# Altium PCB DRV8886_Power_Breakout.PcbDoc
Units mil, origin at the board's own origin, x right, y up, seen from the top; angles counter-clockwise.
Board outline 2650 x 2015.86 mil, 2 copper layers (Top Layer, Bottom Layer); 28 components, 27 nets, 98 pads, 28 vias.
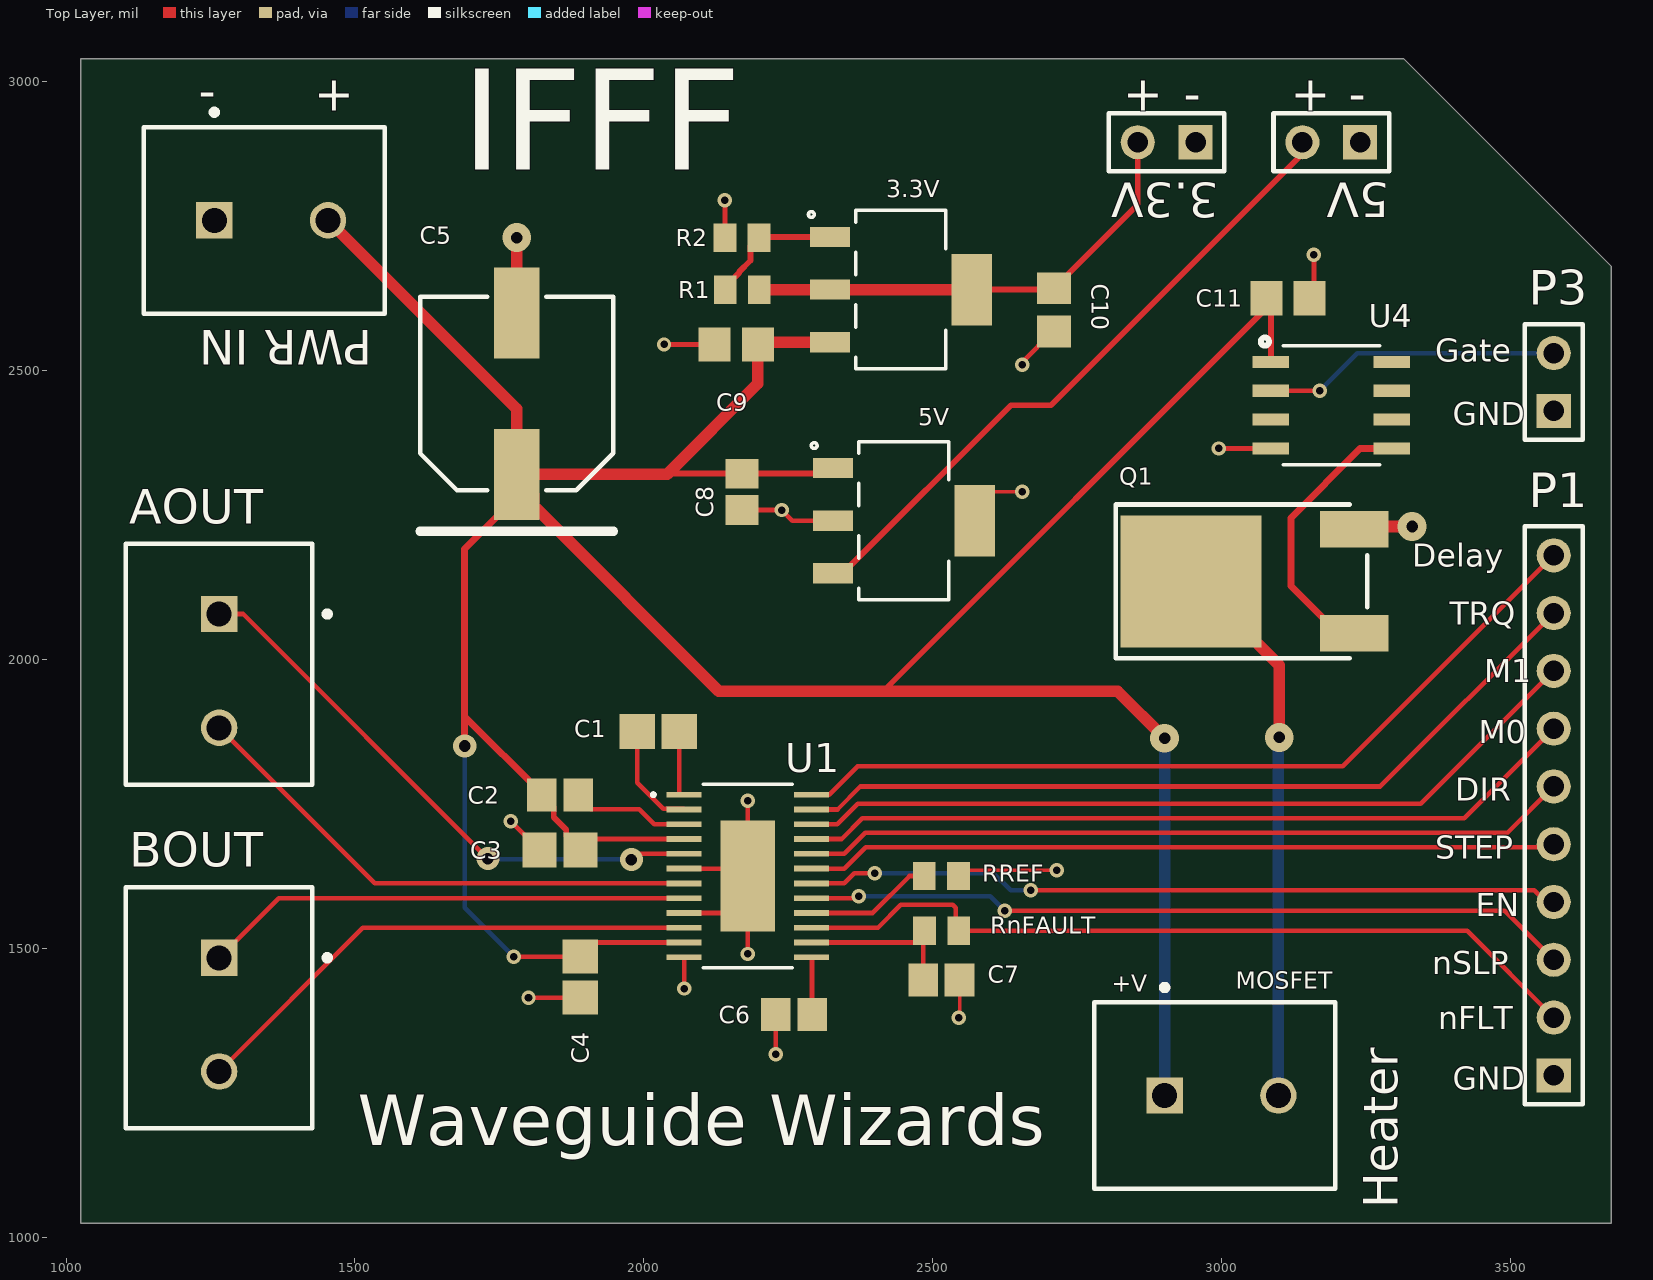
[diagram p0: Top Layer view]
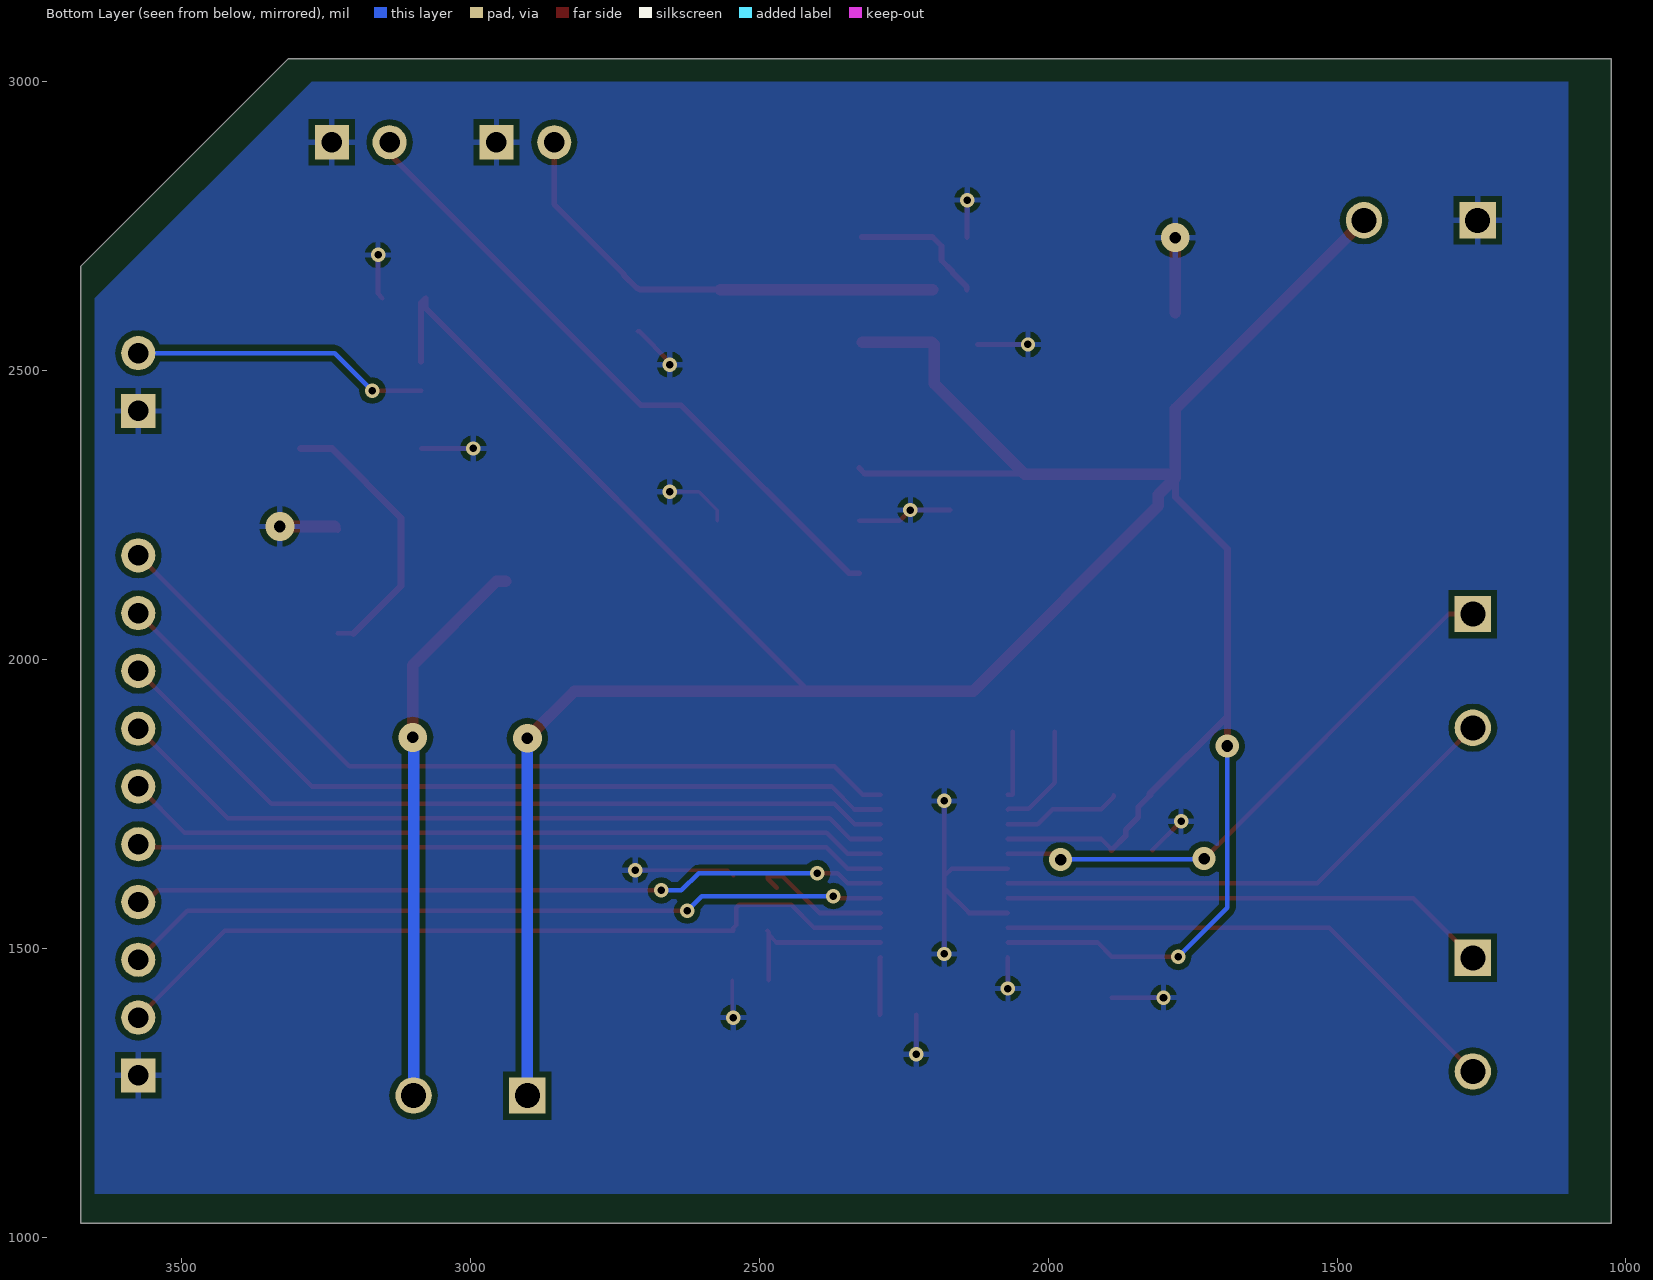
[diagram p1: Bottom Layer view, seen from below]

## Layer stack, top to bottom
Top Solder: solder mask 0.4, Solder Resist, Dk 3.5
Top Layer: signal copper 1.4
Dielectric 1: dielectric 12.6, FR-4, Dk 4.8
Bottom Layer: signal copper 1.4
Bottom Solder: solder mask 0.4, Solder Resist, Dk 3.5

## Board outline
1025,1024.14 1025,3040 3315,3040 3675,2680 3675,1024.14

## Design rules (kind name [scope] priority, off if disabled: settings)
Clearance [All] p1: gap=10 ignorepadtopadclearanceinfootprint=FALSE except(0: Arc-Hole Track-Hole SMDPad-Hole THPad-Hole Via-Hole Fill-Hole Poly-Hole Region-Hole Text-Hole)
PolygonConnect [All] p1: connectstyle=Relief reliefconductorwidth=10 reliefentries=4 polygonreliefangle="90 Angle" airgapwidth=10
RoutingVias [All] p1: holewidth=13 width=25 viastyle="Through Hole" minholewidth=13 minwidth=25 maxholewidth=28 maxwidth=50
SolderMaskExpansion [All] p1: expansion=4
Width [All] p1: maxlimit=20 minlimit=6 preferedwidth=6
30 further rules are at their usual default settings.

## Classes and differential pairs
component class IFFF_DRV8886_Power_Breakout: 3.3V 5V AOUT BOUT C1 C2 C3 C4 C5 C6 C7 C8 C9 C10 C11 Heater P1 P3 "PWR IN" Q1 R1 R2 RnFAULT RREF U1 U4

## Components (designator, comment, footprint, x,y, rotation, side; value= is the part's Value field where it differs from the comment)
3.3V "Part Number: LM317DCYR" DCY4 2445,2640 r270 top value=Value (schematic designator U2)
3.3V "Header 2" HDR1X2 2955,2895 r180 top (schematic designator P2)
5V "Header 2" HDR1X2 3240,2895 r180 top (schematic designator P4)
5V "Part Number: LM7805MPX/NOPB" DCY4 2450,2240 r270 top value=Value (schematic designator U3)
AOUT "282836-2" TECO-282836-2_V 1265,1980 r270 top
BOUT "282836-2" TECO-282836-2_V 1265,1385 r270 top
C1 "0.022uF" CAPC2013X94X50ML20T25 2025,1875 r0 top
C2 "0.22uF" CAPC2013X145X50NL20T25 1855,1765 r0 top
C3 "0.01uF" CAPC2013X88X50ML20T25 1855,1670 r0 top
C4 "0.01uF" CAPC2013X88X50ML20T25 1890,1450 r90 top
C5 "100uF" PNSC-FK-V-F_V 1780,2460 r90 top
C6 "0.47uF" CAPC2013X110X50NL20T25 2260,1385 r0 top
C7 "0.47uF" CAPC2013X110X50NL20T25 2515,1445 r180 top
C8 "0.22uF" CAPC2013X145X50NL20T25 2170,2290 r90 top
C9 "10uF" CAPC2013X135X45ML10T25 2160,2545 r180 top
C10 "10uF" CAPC2013X135X45ML10T25 2710,2605 r270 top
C11 "10uF" CAPC2013X135X45ML10T25 3115,2625 r0 top
Heater "282836-2" TECO-282836-2_V 3000,1245 r0 top
P1 "Header 10" HDR1X10 3575,1280 r90 top
P3 "Extruder Control" HDR1X2 3575,2430 r90 top
"PWR IN" "282836-2" TECO-282836-2_V 1355,2760 r0 top
Q1 "SMD 60V 46A" SC_TO-252AA 2947.13,2135 r0 top (schematic designator Q*)
R1 "" RESC2013X60X40LL20T25_A 2170.47,2640 r0 top
R2 "" RESC2013X60X40LL20T25_A 2170,2730 r0 top
RnFAULT "10k" RESC2013X60X40LL20T25_A 2515.47,1530 r0 top
RREF "30k" RESC2013X60X40LL20T25_A 2515,1625 r180 top
U1 "DRV8886" PWP0024B_N 2180,1625 r0 top
U4 "Part Number: MIC5015YM-TR" SOIC-8_M 3190,2440 r0 top value=Value

## Footprints (in the part's own frame and the unit in brackets; to place one, negate y for a bottom-side part, rotate by r counter-clockwise, add the part's x,y. Pads: shape width x height; smd on the part's side, far side on the other; paste and mask are expansions set on the pad)
CAPC2013X88X50ML20T25 [mm] "Chip Capacitor, 2-Leads, Body 2.00x1.25mm, IPC Low Density"
  rect 1.5x1.55 smd: 1(-0.9,0) 2(0.9,0)
  body extent -1.1,-0.72 1.1,0.72, height 0.88
CAPC2013X94X50ML20T25 [mm] "Chip Capacitor, 2-Leads, Body 2.01x1.25mm, IPC Low Density"
  rect 1.55x1.55 smd: 1(-0.925,0) 2(0.925,0)
  body extent -1.1,-0.72 1.11,0.72, height 0.94
CAPC2013X110X50NL20T25 [mm] "Chip Capacitor, 2-Leads, Body 2.00x1.25mm, IPC Medium Density"
  rect 1.3x1.45 smd: 1(-0.8,0) 2(0.8,0)
  body extent -1.1,-0.72 1.1,0.72, height 1.1
CAPC2013X135X45ML10T25 [mm] "Chip Capacitor, 2-Leads, Body 2.00x1.25mm, IPC Low Density"
  rect 1.4x1.5 smd: 1(-0.95,0) 2(0.95,0)
  body extent -1.05,-0.67 1.05,0.67, height 1.35
CAPC2013X145X50NL20T25 [mm] "Chip Capacitor, 2-Leads, Body 2.00x1.25mm, IPC Medium Density"
  rect 1.3x1.45 smd: 1(-0.8,0) 2(0.8,0)
  body extent -1.1,-0.72 1.1,0.72, height 1.45
DCY4 [mil]
  rect 35x69.5 smd paste+0 mask+0: 1(-91,-122.75) 2(0,-122.75) 3(91,-122.75)
  rect 124x69.5 smd paste+0 mask+0: 4(0,122.75)
  silkscreen extent -137,-160 137,78, body extent -132,-144 132,144, height 67
HDR1X2 [mm] "Connector; Header; 2 Position"
  rect 1.5x1.5 hole 0.9: 1(0,0)
  round 1.5 hole 0.9: 2(2.54,0)
  silkscreen extent -1.27,-1.27 3.81,1.27
HDR1X10 [mm] "Connector; Header; 10 Position"
  rect 1.5x1.5 hole 0.9: 1(0,0)
  round 1.5 hole 0.9: 2(2.54,0) 3(5.08,0) 4(7.62,0) 5(10.16,0) 6(12.7,0) 7(15.24,0) 8(17.78,0) 9(20.32,0) 10(22.86,0)
  silkscreen extent -1.27,-1.27 24.13,1.27
PNSC-FK-V-F_V [mm] "CAPAE, 2-Leads, Body 8.50x8.50mm"
  rect 4x2 smd: 1(-3.55,0) 2(3.55,0)
  silkscreen extent -6.05,-4.25 4.25,4.25, body extent -5,-4.25 5,4.25, height 10.5
PWP0024B_N [mil]
  rect 61x10 smd paste+0 mask+2: 1(-110.24,140.75) 2(-110.24,115.16) 3(-110.24,89.57) 4(-110.24,63.98) 5(-110.24,38.39) 6(-110.24,12.8) 7(-110.24,-12.8) 8(-110.24,-38.39) 9(-110.24,-63.98) 10(-110.24,-89.57) 11(-110.24,-115.16) 12(-110.24,-140.75) 13(110.24,-140.75) 14(110.24,-115.16) 15(110.24,-89.57) 16(110.24,-63.98) 17(110.24,-38.39) 18(110.24,-12.8) 19(110.24,12.8) 20(110.24,38.39) 21(110.24,63.98) 22(110.24,89.57) 23(110.24,115.16) 24(110.24,140.75)
  rect 94x192 smd paste-95.5 mask+3: 25(0,0)
  silkscreen extent -167,-158 77,158, body extent 0,0 10,10, height 10
RESC2013X60X40LL20T25_A [mm] "Chip Resistor, 2-Leads, Body 2.20x1.35mm, IPC High Density"
  rect 1x1.25 smd: 1(-0.75,0) 2(0.75,0)
  body extent -1.1,-0.67 1.1,0.67, height 0.6
SC_TO-252AA [mm] "D-PAK"
  rect 3x1.6 smd: 1(7.18,-2.286) 3(7.18,2.286)
  rect 6.2x5.8 smd: 2(0,0)
  silkscreen extent -3.3,-3.38 7.75,3.38, body extent -2.7,-3.29 7,3.29, height 2.3
SOIC-8_M [mil]
  rect 63x21 smd: 1(-104.5,75) 2(-104.5,25) 3(-104.5,-25) 4(-104.5,-75) 5(104.5,-75) 6(104.5,-25) 7(104.5,25) 8(104.5,75)
  silkscreen extent -122,-103 84,117, body extent -122,-98 122,98, height 66
TECO-282836-2_V [mm] "Female Header, Pitch 5mm, 1 x 2 Position, Height 10mm"
  rect 1.6x1.6 hole 1.1: 1(-2.5,0)
  round 1.6 hole 1.1: 2(2.5,0)
  silkscreen extent -5.6,-4.1 5,4.88, body extent -5.6,-4.1 5,4.1, height 10

## Part data
3.3V: library part LM317DCYR, "No Description Available", Built_By=EMA_UL_Team, ComponentLink1Description=Digikey, ComponentLink1URL=https://www.digikey.com/product-detail/en/texas-instruments/LM317DCYR/296-12602-1-ND/443738, ComponentLink2Description=Datasheet, ComponentLink2URL=http://www.ti.com/lit/ds/symlink/lm317.pdf, Copyright="Copyright (C) 2018 Accelerated Designs. All rights reserved", Manufacturer_Part_Number=LM317DCYR, RefDes=RefDes, Type=DEV, Vendor="Texas Instruments"
3.3V 5V: "Header, 2-Pin", LatestRevisionDate=17-Jul-2002, LatestRevisionNote="Re-released for DXP Platform.", Publisher="Altium Limited"
5V: library part LM7805MPX/NOPB, "No Description Available", Built_By=EMA_Jessica, Copyright="Copyright (C) 2018 Accelerated Designs. All rights reserved", Manufacturer_Part_Number=LM7805MPX/NOPB, RefDes=RefDes, Type=DEV, Vendor="Texas Instruments"
AOUT BOUT Heater "PWR IN": library part CMP-1684-00017-1, "Female Header, Pitch 5 mm, 1 x 2 Position, Height 10 mm, Tail Length 3.5 mm, Rohs, Bulk", Color=Green, Current=13.5A, Manufacturer="TE Connectivity", Package Description="Female Header, Pitch 5 mm, 1 x 2 Position, Height 10 mm, Tail Length 3.5 mm", Package Reference=THD, Standard Package=300, Voltage=300V, 3D Model=282836-2.pdf, Category=Connectors,Interconnects, Clamp Material - Plating=Brass-NickelPlated, Contact Material - Plating=Brass-TinPlated, Datasheet URL=http://www.te.com.cn/commerce/DocumentDelivery/DDEController?Action=showdoc&DocId=Catalog+Section%7F1308389_EUROSTYLE_TERMINAL_BLOCKS%7F0607%7Fpdf%7FEnglish%7FENG_CS_1308389_EUROSTYLE_TERMINAL_BLOCKS_0607.pdf%7F282836-2, Dynamic Catalog=BuchananSeries, Family=TerminalBlocks-WiretoBoard, Featured Product=EurostyleTerminalBlockConnectors, Features=Interlocking(Side), Housing Material=Polyamide(PA66),Nylon6/6, Manufacturer URL=http://www.te.com, Mating Orientation=HorizontalwithBoard, Mounting Type=ThroughHole, Number of Levels=1, Other Names="5ULV-02B / A98076", Packaging=Bulk, Pitch="0.197\"(5.00mm)", Positions Per Level=2, Product Training Modules=Wire-to-BoardEurostyleTerminalBlocks, RoHS Information=282836-2StatementofCompliance, Screw Material - Plating=Brass-NickelPlated, Screw Thread=M3, Series=Buchanan, Torque - Screw=0.68Nm(6Lb-In), Wire Gauge=16-30AWG, Wire Termination=Screw-RisingCageClamp
C1: library part CMP-2007-04396-1, Manufacturer="AVX Interconnect / Elco", Part Number=08055C223JAT2A
C2 C8: library part CMP-2007-01163-1, "0805", Manufacturer=Kemet, Part Number=C0805C224K5RAC7800
C3 C4: library part CMP-2007-00254-1, "0805", Manufacturer=Kemet, Part Number=C0805C103J5RACTU
C5: library part CMP-2000-06208-1, "Aluminum Electrolytic Capacitor, 100 uF, +/- 20%, 50 V, 2-Pin SMD (Size Code F), -55 to 105 degC, RoHS, Tape and Reel", Capacitance=100µF, Case Size/Dimension=Ø8x10.2mm, Lifetime@Temperature=2000Hrs@105°C, Manufacturer=Panasonic, Operating Temp-Max=105°C, Operating Temp Range=-55to+105°C, Package Description="2-Pin Electrolytic Aluminum Capacitor, Body 8.3 x 8.3 mm", Package Reference=FK-V-F, Rated Voltage=50V, Ripple Current=350mA, Datasheet URL=http://industrial.panasonic.com/cdbs/www-data/pdf/RDE0000/ABA0000C1181.pdf, Datasheet Version=03/2016, Impedance=0.34O, Manufacturer URL=http://www.panasonic.com/, Mounting Technology=SurfaceMount, Package URL=http://industrial.panasonic.com/cdbs/www-data/pdf/RDE0000/DME0000COL48.pdf, Series=FK, Type=Can
C6 C7: library part CMP-2007-03659-1, "0805", Manufacturer=Kemet, Part Number=C0805C474K5RACTU
C9 C10 C11: library part CMP-2007-03541-1, "0805", Manufacturer=Murata, Part Number=GRM21BR61E106KA73L
P1: "Header, 10-Pin", LatestRevisionDate=17-Jul-2002, LatestRevisionNote="Re-released for DXP Platform.", Publisher="Altium Limited"
P3: library part "Header 2", "Header, 2-Pin", LatestRevisionDate=17-Jul-2002, LatestRevisionNote="Re-released for DXP Platform.", Publisher="Altium Limited"
Q1: library part NTD5865NLT4G, "N-Channel 60V 46A (Tc) 71W (Tc) Surface Mount DPAK", ComponentLink1Description=Digikey, ComponentLink1URL=https://www.digikey.com/product-detail/en/on-semiconductor/NTD5865NLT4G/NTD5865NLT4GOSCT-ND/2409629
R1 R2 RnFAULT RREF: library part CMP-2000-06228-1, "Metal Film Chip Resistor, High Reliability Type, 0.125 W, +/- 0.1%, -55 to 155 degC, 0805 (2012 Metric), RoHS, Tape and Reel", Case Code - in=0805, Case Code - mm=2012, Manufacturer=Panasonic, Operating Temperature Range=-55Cto+155C, Package / Case=0805(2012metric), Package Description="2-Pin Surface Mount Device, Body 2 x 1.25 mm", Power Rating=125mW(1/8W), Resistance=10kOhms, Temperature Coefficient=25PPM/C, Tolerance=0.1%, Voltage Rating=100V, Brand=Panasonic, Datasheet URL=https://industrial.panasonic.com/cdbs/www-data/pdf/RDM0000/AOA0000C307.pdf, Datasheet Version=02/2016, Factory Pack Quantity=5000, Height=0.5mm, Length=2mm, Manufacturer URL=http://www.panasonic.com/, Mounting Technology=SurfaceMount, Package Reference=0805, Packaging=Reel, Product=ThinFilmResistorsSMD, Product Category=ThinFilmResistors-SMD, RoHS=Details, Series=ERA-6A, Termination Style=SMD/SMT, Type=MetalFilmChipResistors, Width=1.25mm
U4: library part MIC5015YM-TR, "No Description Available", Built_By=EMA_Molly, Copyright="Copyright (C) 2018 Accelerated Designs. All rights reserved", Manufacturer_Part_Number=MIC5015YM-TR, RefDes=RefDes, Type=DEV, Vendor=Microchip

## Via types
v1: diameter 25, hole 13, Top Layer to Bottom Layer, 21 vias
v2: diameter 50, hole 20, Top Layer to Bottom Layer, 4 vias
v3: diameter 40, hole 20, Top Layer to Bottom Layer, 3 vias

## Nets (pads, with @x,y where several pads share a name; then routed paths per layer and width w, separated by ;. In a path a pad name is that pad's centre, name@x,y a point inside that pad or via, vN(x,y) a via of type N, cw(c..) or ccw(c..) an arc to the next point about the centre after c; other vN are vias at no path point)
3V3: 3.3V.2 3.3V.4 C10.1 R1.2 | length 824.8
  Top Layer w10: 3.3V.4 2707.6,2640 C10.1 2711.97,2642.4 2734.53,2664.96 2734.53,2666.93 2855,2787.4 3.3V.2@2855,2895
  Top Layer w20: R1.2 2322.25,2640 3.3V.4
5V: 5V.2@3140,2895 5V.3 | length 1133.5
  Top Layer w10: 5V.3 2344.5,2149 2635.5,2440 2705,2440 3140,2875 5V.2@3140,2895
\FAULT: P1.2 RnFAULT.2 U1.15 | length 1402.4
  Top Layer w8: U1.15 2405.43,1535.43 2445,1575 2535,1575 2539.69,1570.31 2539.69,1540.23 2545,1534.92 RnFAULT.2 3425,1530 P1.2
\SLEEP: P1.3 U1.17 | length 1331.7
  Top Layer w8: U1.17 2368.39,1586.61 v1(2371.77,1590) ; v1(2625,1565) 3490,1565 P1.3
  Bottom Layer w8: v1(2371.77,1590) 2600,1590 v1(2625,1565)
AOUT1: AOUT.1 U1.5 | length 985
  Top Layer w8: AOUT.1 1306.57,2078.43 v3(1730,1655) ; v3(1978.4,1653.4) 1988.39,1663.39 U1.5
  Bottom Layer w8: v3(1730,1655) 1730.8,1654.2 1977.6,1654.2 v3(1978.4,1653.4)
AOUT2: AOUT.2 U1.7 | length 916.3
  Top Layer w8: AOUT.2 1534.37,1612.2 U1.7
BOUT1: BOUT.2 U1.10 | length 907.8
  Top Layer w8: BOUT.2 1513.86,1535.43 U1.10
BOUT2: BOUT.1 U1.8 | length 847.5
  Top Layer w8: BOUT.1 1368.19,1586.61 U1.8
CPH: C1.1 U1.2 | length 188.9
  Top Layer w8: C1.1 1988.58,1786.42 2033.84,1741.16 2068.76,1741.16 U1.2
CPL: C1.2 U1.1 | length 117
  Top Layer w8: C1.2 2061.42,1766.75 2062.42,1765.75 U1.1
Decay: P1.10 U1.24 | length 1456.4
  Top Layer w8: U1.24 2320.75,1765.75 2370,1815 3210,1815 P1.10
DIR: P1.6 U1.20 | length 1333.1
  Top Layer w8: U1.20 2346.94,1663.39 2383.55,1700 3495,1700 P1.6
ENABLE: P1.4 U1.18 | length 1312.8
  Top Layer w8: U1.18 2346.67,1612.2 2364.47,1630 v1(2400,1630) ; v1(2670,1600) 3541.18,1600 3561.18,1580 P1.4
  Bottom Layer w8: v1(2400,1630) 2605.2,1630 2635.2,1600 v1(2670,1600)
GND: 3.3V.1@2955,2895 5V.1@3240,2895 5V.2@2327.25,2240 5V.4 "PWR IN.1" C3.1 C4.1 C5.2 C6.1 C7.1 C8.1 C9.2 C10.2 C11.2 P1.1 P3.1 Q1.3 R2.1 RREF.1 U1.6 U1.9 U1.12 U1.25 U4.4 | length 1945
  Top Layer w6: RREF.1 2554.53,1635 v1(2715,1635) ; v1(2545,1380) 2546.5,1381.5 C7.1 ; 5V.4 2572.75,2258.25 2604.5,2290 v1(2655,2290)
  Top Layer w8: v1(1770,1719.57) C3.1 ; v1(1800.43,1414.57) C4.1 ; v1(2035,2545) C9.2 ; v1(2069.76,1430.24) U1.12 ; U1.9 2137,1561.02 U1.25@2180,1604.02 ; U1.6 2167.2,1637.8 U1.25 ; v1(2140,2795) 2140.47,2794.53 R2.1 ; C8.1 v1(2238.5,2258.5) 2257.01,2240 5V.2@2327.25,2240 ; v1(2180,1490) U1.25@2180,1604.02 ; v1(2180,1755) U1.25 ; v1(2228.5,1316.5) C6.1 ; v1(2655,2510) 2655,2514.57 2708.03,2567.6 C10.2 ; v1(2995,2365) U4.4 ; C11.2 3160,2632.6 v1(3160,2700) ; U1.25@2180,1604.02 U1.25
  Top Layer w12: Q1.3 Q1.3@3234.8,2230
  Top Layer w20: C5.2 v2(1780,2730) ; Q1.3@3234.8,2230 v2(3330,2230)
M0: P1.7 U1.21 | length 1363.9
  Top Layer w8: U1.21 2342.36,1688.98 2378.38,1725 3420,1725 P1.7
M1: P1.8 U1.22 | length 1394.7
  Top Layer w8: U1.22 2335.15,1714.57 2370.58,1750 3345,1750 P1.8
NetC6_2: C6.2 U1.13 | length 99.8
  Top Layer w8: U1.13 2291.24,1483.25 2291.24,1385.26 C6.2
NetC7_2: C7.2 RnFAULT.1 U1.14 | length 284.8
  Top Layer w8: U1.14 2470.26,1509.84 RnFAULT.1@2483.5,1523.09 ; C7.2 RnFAULT.1@2483.5,1523.09 ; RnFAULT.1 2483.5,1527.56 RnFAULT.1@2483.5,1523.09
NetHeater_2: Heater.2 Q1.2 | length 966.5
  Top Layer w20: Q1.2@2939.25,2135 Q1.2 2955,2135 3100,1990 v2(3100,1865)
  Bottom Layer w20: Heater.2 3098.43,1863.43 v2(3100,1865)
NetP3_2: P3.2 U4.2 | length 516.4
  Top Layer w8: U4.2 v1(3170,2465)
  Bottom Layer w8: v1(3170,2465) 3235,2530 P3.2
NetQ*_1: Q1.1 U4.5 | length 485.8
  Top Layer w8: Q1.1@3202.24,2045 Q1.1
  Top Layer w12: Q1.1@3202.24,2045 3120,2127.24 3120,2245 3240,2365 U4.5
NetR1_1: 3.3V.1@2322.25,2731 R1.1 R2.2 | length 237.4
  Top Layer w10: R1.1 2140.94,2644.92 2165.31,2669.29 2165.31,2670.87 2184.84,2690.39 2184.84,2715.31 R2.2 2200.53,2731 3.3V.1@2322.25,2731
NetRREF_2: RREF.2 U1.16 | length 248.8
  Top Layer w8: U1.16 2396.02,1561.02 2460,1625 RREF.2 2485.47,1620.08 RREF.2@2469.79,1604.39
STEP: P1.5 U1.19 | length 1302.2
  Top Layer w8: U1.19 2346.81,1637.8 2384.01,1675 3570,1675 P1.5
TRQ: P1.9 U1.23 | length 1425.5
  Top Layer w8: U1.23 2335.29,1740.16 2375.13,1780 3275,1780 P1.9
VCP: C2.2 U1.3 | length 205.9
  Top Layer w8: C2.2 1886.5,1762.05 1908.09,1740.46 1991.93,1740.46 2017.81,1714.57 U1.3
VM: 3.3V.3 5V.1@2327.25,2331 "PWR IN.2" C2.1 C3.2 C4.2 C5.1 C8.2 C9.1 C11.1 Heater.1 U1.4 U1.11 U4.1 | length 6274.4
  Top Layer w8: v1(1775,1485) 1775.43,1485.43 C4.2 1914.41,1509.84 U1.11 ; C3.2@1890.43,1670.98 1908.43,1688.98 U1.4
  Top Layer w10: C2.1 1844.09,1744.41 1844.09,1726.72 1865.91,1704.91 1865.91,1694.53 C3.2 ; 2040.24,2320.24 2041.5,2321.5 C8.2 2317.75,2321.5 5V.1@2327.25,2331 ; C9.1 C9.1@2201.4,2549 ; 2415,1945 3077.6,2607.6 C11.1 3085.5,2617.1 U4.1
  Top Layer w12: v3(1690,1850) 1690,1901.46 ; C5.1@1780,2314.37 1780,2280.87 1690,2190.87 1690,1901.46 ; C2.1 1823.5,1767.95 1690,1901.46
  Top Layer w20: 1453.43,2760 1780,2433.43 C5.1 ; 2040.24,2320.24 C5.1 ; 2041.5,2321.5 2197.4,2477.4 C9.1 ; C9.1@2201.4,2549 3.3V.3 ; v2(2901.57,1863.43) 2820,1945 2415,1945 2130,1945 1809.37,2265.63 1809.37,2285 1780,2314.37 C5.1
  Bottom Layer w8: v3(1690,1850) 1690,1570 v1(1775,1485)
  Bottom Layer w20: v2(2901.57,1863.43) Heater.1 2907.95,1251.38 Heater.1@2905,1254.33
pads on no net: U4.3 U4.6 U4.7 U4.8

## Polygon pours and split planes (outlines as drawn)
GND on Bottom Layer "Bottom Layer-No Net" (solid, pour order 2): 1100,1075 3650,1075 3650,2625 3275,3000 1100,3000

## Silkscreen, mask and mechanical layers (free items; w line width, h text height)
Top Overlay:
  text "-" at 1230,2955 h60
  text "+" at 1430,2950 h60
  text "+" at 2830,2950 h60
  text "-" at 2935,2950 h60
  text "+" at 3120,2950 h60
  text "-" at 3220,2950 h60
  text "IFFF" at 1685,2790 h300
  text "Gate" at 3370,2515 h40
  text "GND" at 3400,2405 h40
  text "Delay" at 3330,2160 h40
  text "TRQ" at 3395,2060 h40
  text "M1" at 3455,1960 h40
  text "M0" at 3445,1855 h40
  text "DIR" at 3405,1755 h40
  text "STEP" at 3370,1655 h40
  text "EN" at 3440,1555 h40
  text "nSLP" at 3365,1455 h40
  text "MOSFET" at 3025,1430 h30
  text "+V" at 2810,1425 h30
  text "nFLT" at 3375,1360 h40
  text "GND" at 3400,1255 h40
  text "Waveguide Wizards" at 1505,1130 h150
Mechanical 1:
  the board outline again, w25

## Text inside footprints (layer, text, board x,y; h text height)
U4: Mechanical 13 "*" at 3114,2485 h50